# Altium PCB TinyPICO.PcbDoc
Units mil, origin at the board's own origin, x right, y up, seen from the top; angles counter-clockwise.
Board outline 1254 x 700 mil, 4 copper layers (Top, GND, 3.3V, Bottom), stack 67.876 mil thick; 37 components, 62 nets, 192 pads, 168 vias.
Unrouted connection lines stored in the file: 123.
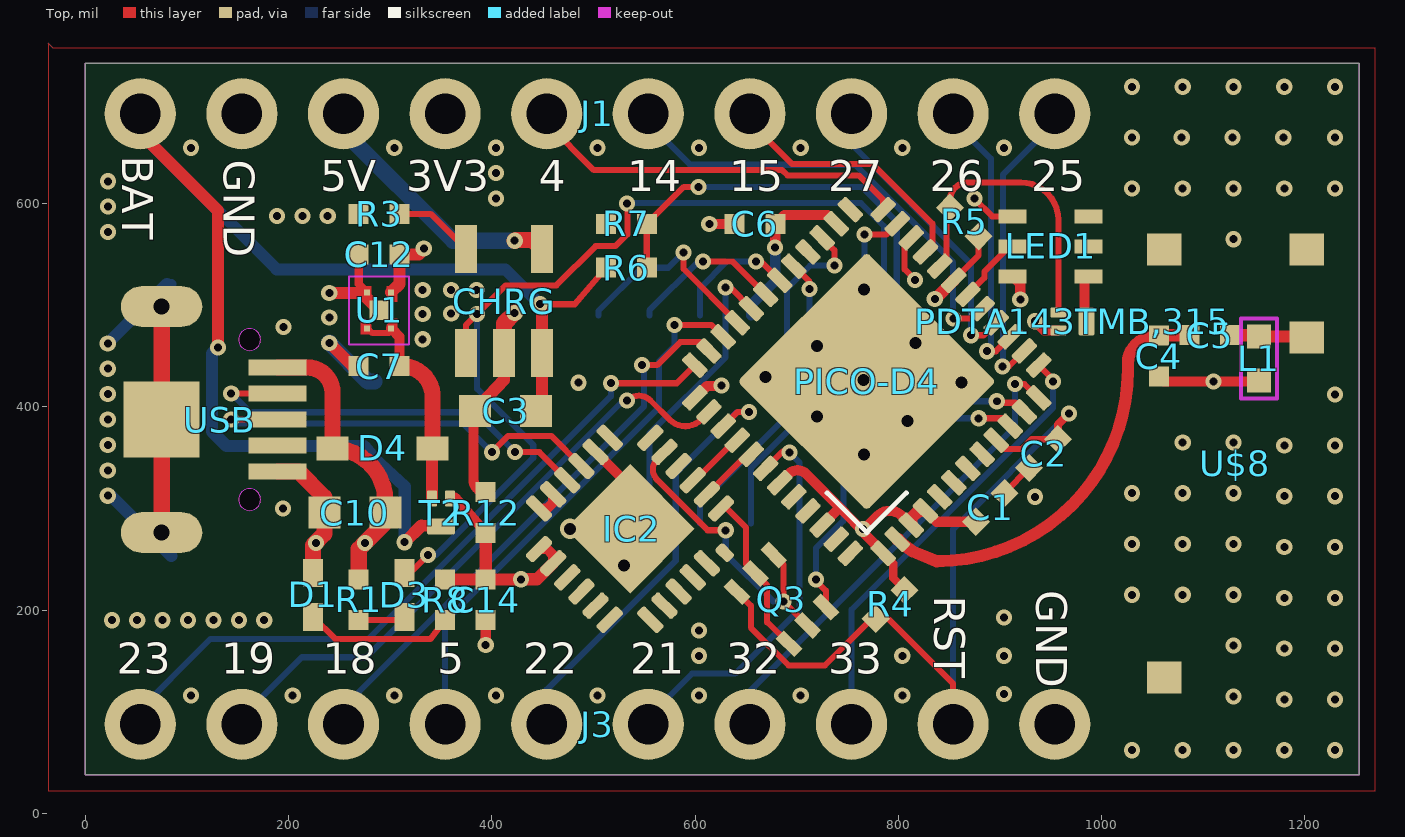
[diagram p0: Top view]
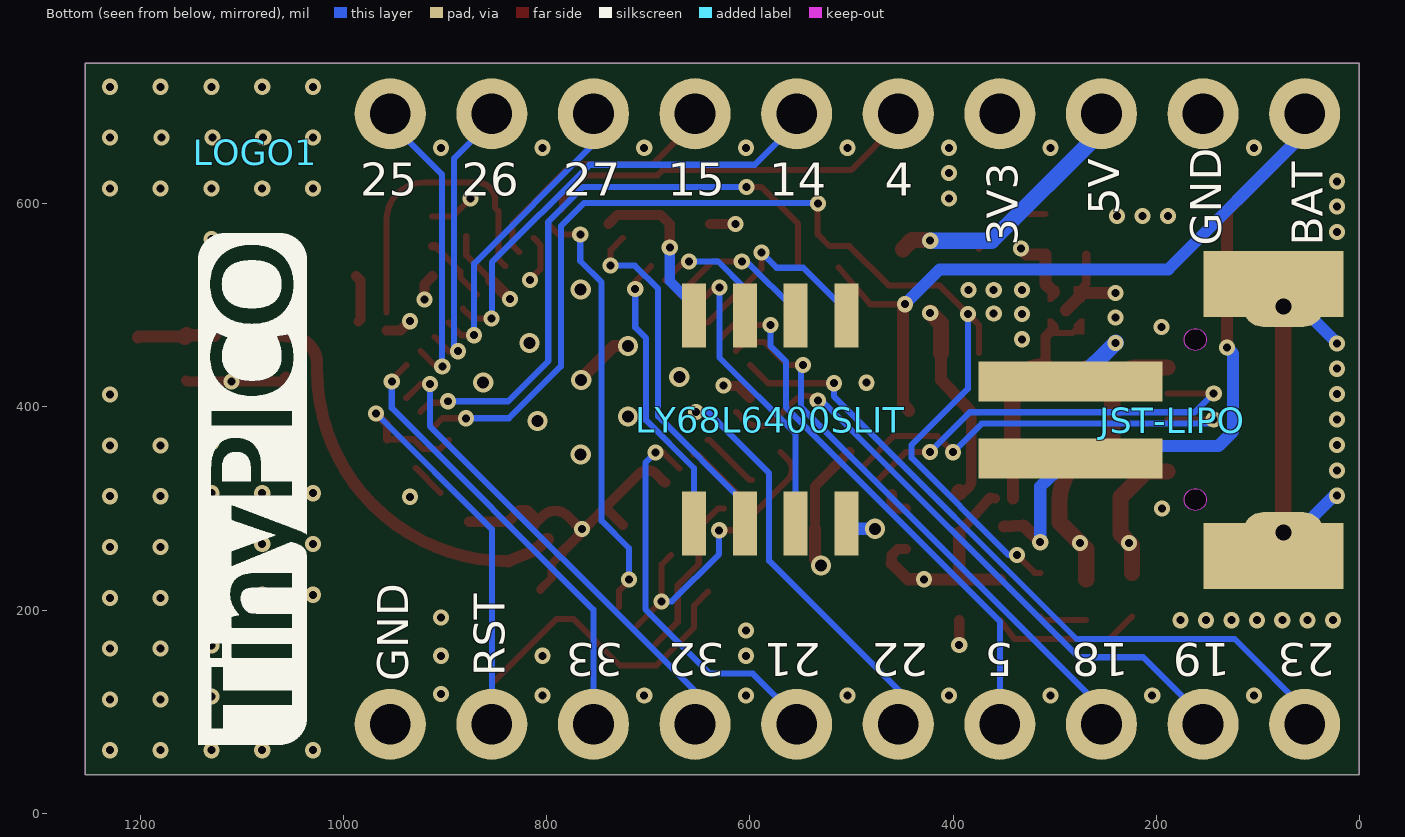
[diagram p1: Bottom view, seen from below]
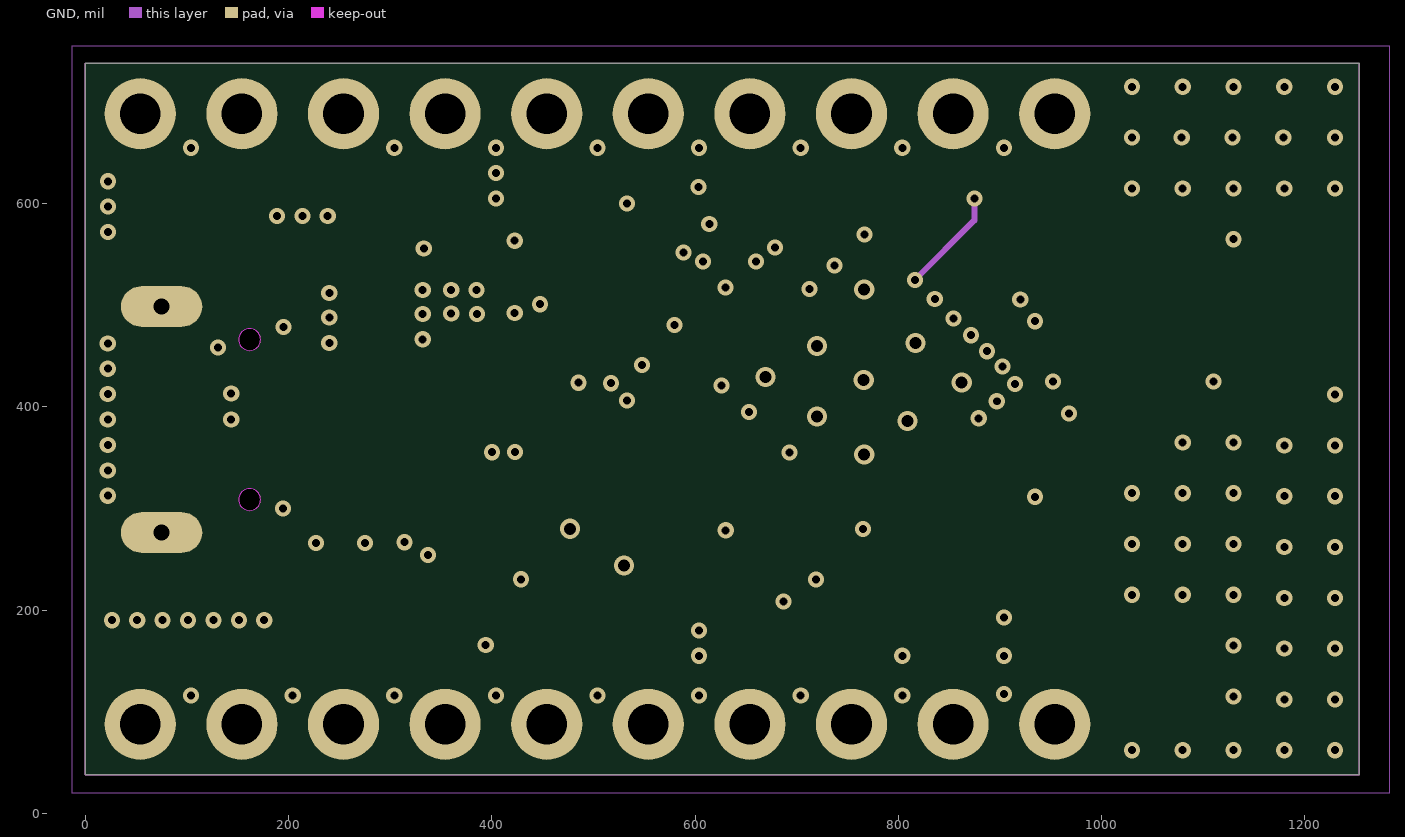
[diagram p2: GND]

## Layer stack, top to bottom
Top Solder: solder mask 0.4, Solder Resist, Dk 3.5
Top: signal copper 1.378
Dielectric 1: core 7.0866, FR-4, Dk 4.8
GND: signal copper 0.6693
Dielectric2: dielectric 12.6, FR-4, Dk 4.8
3.3V: signal copper 0.6693
Dielectric 3: prepreg 44.0945, FR-4, Dk 4.8
Bottom: signal copper 1.378
Bottom Solder: solder mask 0.4, Solder Resist, Dk 3.5

## Board outline
1254,738 1254,38 0,38 0,738
cut-out: 161.61,297.94 ccw(c161.61,308.76) 172.44,308.76 ccw(c161.61,308.76) 161.61,319.58 ccw(c161.61,308.76) 150.78,308.76 ccw(c161.61,308.76)
cut-out: 161.61,455.42 ccw(c161.61,466.24) 172.44,466.24 ccw(c161.61,466.24) 161.61,477.06 ccw(c161.61,466.24) 150.78,466.24 ccw(c161.61,466.24)

## Design rules (kind name [scope] priority, off if disabled: settings)
BoardOutlineClearance mdCopperDimension [All] p1: gap=10 ignorepadtopadclearanceinfootprint=FALSE except(0: Arc-SplitContinuation Track-SplitContinuation SMDPad-SplitContinuation THPad-SplitContinuation Via-SplitContinuation Fill-SplitContinuation Poly-SplitContinuation Region-SplitContinuation Text-SplitContinuation; 9: Poly-OutlineEdge Poly-CavityEdge Poly-CutoutEdge Poly-SplitBarrior)
Clearance Clearance_for_PolygonClass_Isolate_12 [InPolygonClass('Isolate_12') vs IsArc Or IsTrack Or IsPad Or IsVia Or IsFill Or IsRegion Or IsText] p1: gap=12 ignorepadtopadclearanceinfootprint=FALSE
Clearance "Clearance (Same Net)" [All] p2: gap=5 ignorepadtopadclearanceinfootprint=FALSE
Clearance [All] p3: gap=5 ignorepadtopadclearanceinfootprint=FALSE
HoleSize [All] p1: absolutevalues=TRUE maxlimit=100000 minlimit=7 maxpercent=80.000 minpercent=20.000
HoleToHoleClearance mdDrill [All] p1: gap=6 allowstackedmicrovias=TRUE
MinimumSolderMaskSliver [All] p1 off: minsoldermaskwidth=10
PasteMaskExpansion Expansion_SMDPaste_OFF [InPadClass('SMDPaste_OFF')] p1: expansion=0
PasteMaskExpansion mlMinCreamFrame [All] p2: expansion=0
PolygonConnect PolygonConnect_For_PolygonThermal_ON_Width100000_Gap100000 [InPolygonClass('PolygonThermal_ON_Width100000_Gap100000') vs Not IsVia] p1: connectstyle=Relief reliefconductorwidth=10 reliefentries=4 polygonreliefangle="90 Angle" airgapwidth=10
PolygonConnect PolygonConnect_For_PolygonThermal_ON_Width60000_Gap100000 [InPolygonClass('PolygonThermal_ON_Width60000_Gap100000') vs Not IsVia] p2: connectstyle=Relief reliefconductorwidth=6 reliefentries=4 polygonreliefangle="90 Angle" airgapwidth=10
PolygonConnect ThermalVias [IsVia] p3: connectstyle=Direct reliefconductorwidth=10 reliefentries=4 polygonreliefangle="90 Angle" airgapwidth=10
PolygonConnect [All] p4: connectstyle=Relief reliefconductorwidth=10 reliefentries=4 polygonreliefangle="90 Angle" airgapwidth=10
RoutingVias [All] p1: holewidth=7 width=15 viastyle="Through Hole" minholewidth=7 minwidth=15 maxholewidth=100 maxwidth=100
SolderMaskExpansion Expansion_SMDSolder_OFF [InPadClass('SMDSolder_OFF')] p1: expansion=0 istentingtop=FALSE
SolderMaskExpansion mlMinStopFrame [All] p2: expansion=1.25 istentingtop=FALSE
Width [All] p1: maxlimit=10 minlimit=5 preferedwidth=5
26 further rules are at their usual default settings.

## Classes and differential pairs
polygon class PolygonThermal_ON_Width100000_Gap100000: Polygon_1_Net_3.3V Polygon_1_Net_GND Polygon_1_Net_USB
polygon class PolygonThermal_ON_Width60000_Gap100000: Polygon_2_Net_GND
polygon class Isolate_12: Polygon_2_Net_GND
pad class SMDSolder_OFF: D1-P$1 D1-P$2 D3-P$1 D3-P$2 PDTA143TMB,315-1 PDTA143TMB,315-2 PDTA143TMB,315-3 PICO-D4-1 PICO-D4-2 PICO-D4-3 PICO-D4-4 PICO-D4-5 PICO-D4-6 PICO-D4-7 PICO-D4-8 PICO-D4-9 PICO-D4-10 PICO-D4-11 PICO-D4-12 PICO-D4-13 PICO-D4-14 PICO-D4-15 PICO-D4-16 PICO-D4-17 PICO-D4-18 PICO-D4-19 PICO-D4-20 PICO-D4-21 PICO-D4-22 PICO-D4-23 PICO-D4-24 PICO-D4-25 PICO-D4-26 PICO-D4-27 PICO-D4-28 PICO-D4-29 PICO-D4-30 PICO-D4-31 PICO-D4-32 PICO-D4-33 PICO-D4-34 PICO-D4-35 PICO-D4-36 PICO-D4-37 PICO-D4-38 PICO-D4-39 PICO-D4-40 PICO-D4-41 PICO-D4-42 PICO-D4-43 PICO-D4-44 PICO-D4-45 PICO-D4-46 PICO-D4-47 PICO-D4-48 PICO-D4-EXP T2-1 T2-2 T2-3 U1-1 U1-2 U1-3 U1-4
pad class SMDPaste_OFF: D1-P$1 D1-P$2 D3-P$1 D3-P$2 IC2-THERM PDTA143TMB,315-1 PDTA143TMB,315-2 PDTA143TMB,315-3 PICO-D4-1 PICO-D4-2 PICO-D4-3 PICO-D4-4 PICO-D4-5 PICO-D4-6 PICO-D4-7 PICO-D4-8 PICO-D4-9 PICO-D4-10 PICO-D4-11 PICO-D4-12 PICO-D4-13 PICO-D4-14 PICO-D4-15 PICO-D4-16 PICO-D4-17 PICO-D4-18 PICO-D4-19 PICO-D4-20 PICO-D4-21 PICO-D4-22 PICO-D4-23 PICO-D4-24 PICO-D4-25 PICO-D4-26 PICO-D4-27 PICO-D4-28 PICO-D4-29 PICO-D4-30 PICO-D4-31 PICO-D4-32 PICO-D4-33 PICO-D4-34 PICO-D4-35 PICO-D4-36 PICO-D4-37 PICO-D4-38 PICO-D4-39 PICO-D4-40 PICO-D4-41 PICO-D4-42 PICO-D4-43 PICO-D4-44 PICO-D4-45 PICO-D4-46 PICO-D4-47 PICO-D4-48 PICO-D4-EXP T2-1 T2-2 T2-3 U1-1 U1-2 U1-3 U1-4

## Components (designator, comment, footprint, x,y, rotation, side; value= is the part's Value field where it differs from the comment)
C1 "" _0402MP 890.5,301 r45 top
C2 "" _0402MP 943,354 r225 top
C3 "" _0603MP 413.5,396 r180 top
C4 "0.75pF" _0402MP 1056.5,450 r270 top
C5 "" _0402MP 1106.5,470.5 r0 top
C6 "0.1uF" _0402MP 659,580 r180 top
C7 "" _0402MP 289,440 r180 top
C10 "" _0603MP 265.2,296 r0 top
C12 "" _0402MP 289,550 r180 top
C14 "" _0402MP 394,210 r270 top
CHRG "TP4065-4.2V-SOT25-R" SOT23-5 412,504 r0 top
D1 "RED" 0402.LED 224,215 r90 top
D3 "ORANGE" 0402.LED 314,215 r90 top
D4 "" SOD323_ST 292.5,359 r180 top
IC2 "" MICROBUILDER_QFN24_4MM_SMSC 536,280 r315 top
J1 "" 1X10_NO_SILK 54,688.5 r0 top
J3 "" 1X10_NO_SILK 54,87.5 r0 top
JST-LIPO "LIPO" JSTPH2 142.5,387 r270 bottom
L1 "7.5nH" RESC0402_N 1155,447.5 r90 top
LED1 "" MICROBUILDER_APA102_2020 950,558 r180 top
LOGO1 "" OSHW-LOGO-S 1086.72,650.74 r90 bottom
LY68L6400SLIT "PSRAM0" SOP8 580,387.5 r180 bottom
PDTA143TMB,315 "TINYPICO-PNPAMB" SOT883(B) 971.5,484 r0 top
PICO-D4 "" PICO-D4-QFN48 769,425 r135 top
Q3 "" DUAL_NPN_SC70-6 685,210.5 r225 top
R1 "" _0402MP 269,210 r270 top
R3 "" _0402MP 289,590 r180 top
R4 "" _0402MP 792,205.5 r45 top
R5 "100K" _0402MP 865,582 r315 top
R6 "" _0402MP 532.5,537 r0 top
R7 "" _0402MP 532.5,580 r180 top
R8 "" _0402MP 354,210 r270 top
R12 "" _0402MP 394,296 r90 top
T2 "" SOT883(B) 350,296 r270 top
U1 "" VREG_NCP170AMX300TCG 289,495 r270 top
U$8 "" PRO-OB-440 1029,118 r90 top
USB "C40942" USB-B-MICRO-SMD 75,387.5 r0 top

## Footprints (in the part's own frame and the unit in brackets; to place one, negate y for a bottom-side part, rotate by r counter-clockwise, add the part's x,y. Pads: shape width x height; smd on the part's side, far side on the other; paste and mask are expansions set on the pad)
1X10_NO_SILK [mil] "1X10_NO_SILK"
  round 70 hole 40: 1(0,0) 2(100,0) 3(200,0) 4(300,0) 5(400,0) 6(500,0) 7(600,0) 8(700,0) 9(800,0) 10(900,0)
0402.LED [mil] "0402.LED"
  rect 27.56x19.69 smd paste+0 mask+0: P$1(-21.65,0) P$2(21.65,0)
_0402MP [mil] "_0402MP"
  rect 19.69x19.69 smd: 1(-20,0) 2(20,0)
_0603MP [mil] "_0603MP"
  rect 31.5x31.5 smd: 1(-30,0) 2(30,0)
DUAL_NPN_SC70-6 [mm] "DUAL_NPN_SC70-6"
  rect 0.3x0.66 smd: 1(-0.65,-0.92) 2(0,-0.92) 3(0.65,-0.92) 4(0.65,0.92) 5(0,0.92) 6(-0.65,0.92)
JSTPH2 [mil] "JSTPH2"
  rect 39.37x181.1 smd: 1(-38,-142) 2(38,-142)
  rect 65x138 smd: SHLD1(-133.86,58) SHLD2(133.86,58)
MICROBUILDER_APA102_2020 [mm] "MICROBUILDER_APA102_2020"
  rect 0.7x0.35 smd: 1(-0.95,-0.75) 2(-0.95,0) 3(-0.95,0.75) 4(0.95,0.75) 5(0.95,0) 6(0.95,-0.75)
MICROBUILDER_QFN24_4MM_SMSC [mil] "MICROBUILDER_QFN24_4MM_SMSC"
  rrect50% 29x11.02 smd: 1(-77.5,49.21) 2(-77.5,29.53) 3(-77.5,9.84) 4(-77.5,-9.84) 5(-77.5,-29.53) 6(-77.5,-49.21) 13(77.5,-49.21) 14(77.5,-29.53) 15(77.5,-9.84) 16(77.5,9.84) 17(77.5,29.53)
  rrect50% 11.02x29 smd: 7(-49.21,-77.5) 8(-29.53,-77.5) 9(-9.84,-77.5) 10(9.84,-77.5) 11(29.53,-77.5) 12(49.21,-77.5) 19(49.21,77.5) 20(29.53,77.5) 21(9.84,77.5) 22(-9.84,77.5) 23(-29.53,77.5) 24(-49.21,77.5)
  rrect50% 18x11.02 smd: 18(82.5,49.21)
  rect 90x90 smd paste+0: THERM(0,0)
OSHW-LOGO-S [mil] "OSHW-LOGO-S"
PICO-D4-QFN48 [mil] "PICO-D4-QFN48"
  rrect30% 26x11.81 smd paste+0 mask+0: 1(-131,108.27) 2(-131,88.58) 3(-131,68.9) 4(-131,49.21) 5(-131,29.53) 6(-131,9.84) 7(-131,-9.84) 8(-131,-29.53) 9(-131,-49.21) 10(-131,-68.9) 11(-131,-88.58) 12(-131,-108.27) 25(131,-108.27) 26(131,-88.58) 27(131,-68.9) 28(131,-49.21) 29(131,-29.53) 30(131,-9.84) 31(131,9.84) 32(131,29.53) 33(131,49.21) 34(131,68.9) 35(131,88.58) 36(131,108.27)
  rrect30% 11.81x26 smd paste+0 mask+0: 13(-108.27,-131) 14(-88.58,-131) 15(-68.9,-131) 16(-49.21,-131) 17(-29.53,-131) 18(-9.84,-131) 19(9.84,-131) 20(29.53,-131) 21(49.21,-131) 22(68.9,-131) 23(88.58,-131) 24(108.27,-131) 37(108.27,131) 38(88.58,131) 39(68.9,131) 40(49.21,131) 41(29.53,131) 42(9.84,131) 43(-9.84,131) 44(-29.53,131) 45(-49.21,131) 46(-68.9,131) 47(-88.58,131) 48(-108.27,131)
  rrect5% 180x180 smd paste+0 mask+0: EXP(0,0)
  silkscreen extent -105,50 -50,105
PRO-OB-440 [mil] "PRO-OB-440"
  rect 31.5x33.86 smd: FEED(350.39,-173.23) GND(437.01,-173.23) P$3(437.01,-32.68) P$4(15.75,-32.68)
RESC0402_N [mil] "RESC0402_N"
  rect 23.62x23.62 smd: 1(-21.65,0) 2(21.65,0)
  Top keep-out lines w3.94: -39.37,17.72 -39.37,-17.72 39.37,-17.72 39.37,17.72 -39.37,17.72
SOD323_ST [mil] "SOD323_ST"
  rect 31.5x23.62 smd: A(49.21,0) C(-49.21,0)
SOP8 [mil] "SOP8"
  rect 23.62x62.99 smd: 1(-75,-102.36) 2(-25,-102.36) 3(25,-102.36) 4(75,-102.36) 5(75,102.36) 6(25,102.36) 7(-25,102.36) 8(-75,102.36)
SOT23-5 [mil] "SOT23-5"
  rect 21.65x47.24 smd: 1(-37.4,-51.19) 2(0,-51.19) 3(37.4,-51.19) 4(37.4,51.19) 5(-37.4,51.19)
SOT883(B) [mm] "SOT883(B)"
  rrect25% 0.4x0.25 smd paste+0 mask+0: 1(-0.35,0.225) 2(-0.35,-0.225)
  rrect25% 0.4x0.7 smd paste+0 mask+0: 3(0.35,0)
USB-B-MICRO-SMD [mil] "USB-B-MICRO-SMD"
  rect 57.09x15.75 smd: D+(114.17,0) D-(114.17,25.59) GND(114.17,-51.18) ID(114.17,-25.59) VBUS(114.17,51.18)
  oval 80x40 hole 15.75: P$1(0,111.22) P$2(0,-111.22)
  rect 74.8x74.8 smd: SHIELD3(0,0)
VREG_NCP170AMX300TCG [mil] "VREG_NCP170AMX300TCG"
  rect 6x6 smd paste+0 mask+0: 1(-17.72,11.81) 2(-17.72,-11.81) 3(17.72,-11.81) 4(17.72,11.81)
  rect 19x19 smd: 5(0,0)
  Top region: 8.27,17.91 8.27,13.58 14.17,7.68 23.62,7.68 23.62,17.91 8.27,17.91
  Top region: -14.17,7.68 -23.62,7.68 -23.62,17.91 -8.27,17.91 -8.27,13.58 -14.17,7.68
  Top region: 8.27,-17.91 8.27,-13.58 14.17,-7.68 23.62,-7.68 23.62,-17.91 8.27,-17.91
  Top region: -8.27,-17.91 -8.27,-13.58 -14.17,-7.68 -23.62,-7.68 -23.62,-17.91 -8.27,-17.91
  Top keep-out lines w1.97: 33.46,-29.53 -33.46,-29.53 -33.46,29.53 33.46,29.53 33.46,-29.53

## Part data
C1 C2 C4 C5 C6 C7 C12 C14 R1 R3 R4 R5 R6 R7 R8 R12: library part _0402MP, PackageName=_0402MP
C3 C10: library part _0603MP, PackageName=_0603MP
CHRG: library part SOT23-5, PackageName=SOT23-5
D1 D3: library part 0402.LED, PackageName=0402.LED
D4: library part SOD323_ST, PackageName=SOD323_ST
IC2: library part MICROBUILDER_QFN24_4MM_SMSC, PackageName=MICROBUILDER_QFN24_4MM_SMSC
J1 J3: library part 1X10_NO_SILK, PackageName=1X10_NO_SILK
JST-LIPO: library part JSTPH2, PackageName=JSTPH2
L1: library part RESC0402_N, PackageName=RESC0402_N
LED1: library part MICROBUILDER_APA102_2020, PackageName=MICROBUILDER_APA102_2020
LOGO1: library part OSHW-LOGO-S, PackageName=OSHW-LOGO-S
LY68L6400SLIT: library part SOP8, PackageName=SOP8
PDTA143TMB,315 T2: library part SOT883(B), PackageName=SOT883(B)
PICO-D4: library part PICO-D4-QFN48, PackageName=PICO-D4-QFN48
Q3: library part DUAL_NPN_SC70-6, PackageName=DUAL_NPN_SC70-6
U1: library part VREG_NCP170AMX300TCG, PackageName=VREG_NCP170AMX300TCG
U$8: library part PRO-OB-440, PackageName=PRO-OB-440
USB: library part USB-B-MICRO-SMD, PackageName=USB-B-MICRO-SMD

## Free pads (board coordinates)
  round 21.65 hole 21.65 unplated: MH1(161.61,466.24) MH2(161.61,308.76)

## Via types
v1: diameter 15.87/15.87/15.87/15.87 (per signal layer), hole 7.87, Top to Bottom, 157 vias
v2: diameter 19.81/19.81/19.81/19.81 (per signal layer), hole 11.81, Top to Bottom, 11 vias

## Nets (pads, with @x,y where several pads share a name; then routed paths per layer and width w, separated by ;. In a path a pad name is that pad's centre, name@x,y a point inside that pad or via, vN(x,y) a via of type N, cw(c..) or ccw(c..) an arc to the next point about the centre after c; other vN are vias at no path point)
3.3V: C1.1 C12.1 J1.4 PDTA143TMB,315.2 PICO-D4.1 PICO-D4.3 PICO-D4.4 PICO-D4.19 PICO-D4.37 PICO-D4.43 PICO-D4.46 R4.2 R5.2 U1.1 | length 563.3
  Top w6: PICO-D4.19 879.14,549.06 R5.2
  Top w8: PICO-D4.1 795.07,245.81 795.07,231.71 806.14,220.64 R4.2
  Top w10: PICO-D4.37 600.16,408.93 611.87,420.64 625.64,420.64 v1(626,421) ; PICO-D4.43 683.67,325.41 692.39,334.12 cw(c700.76,325.75) 709.14,334.12 741.38,301.88 741.38,301.8 748.55,294.63 ; PICO-D4.46 725.15,283.65 742.38,300.88 748.55,294.63 ; PICO-D4.1 785.07,256.81 776.56,265.33 776.56,265.4 765.35,276.61 cw(c766.85,278.11) v1(765.35,279.61) ; PICO-D4.3 804.2,292.37 ccw(c791.65,279.82) 779.1,292.37 766.34,279.61 v1(765.35,279.61) ; PICO-D4.4 827.18,297.57 837.89,286.86 C1.1 ; v1(836,506) v1@836.08,506 ; v1(934.5,484.28) 943.5,475.28 952.58,475.28 952.72,475.14 957.72,475.14 ; 748.55,294.63 763.37,279.61 v1(765.35,279.61)
  Top w12: U1.1 309,520.91 C12.1 328,550 333,555 v1(333,556) ; PICO-D4.3 812.91,290.65 819.83,297.57 PICO-D4.4 ; v1@836.08,506 PICO-D4.19
3V: IC2.5 IC2.6 | length 24.4
  Top w10: IC2.6 454.4,300 460.32,305.92 IC2.5
ANT: C5.2 L1.2 U$8.FEED | length 80.1
  Top w12: C5.2@1127,470 C5.2 1154.5,470.5 1154.5,469.65 L1.2 1201.47,469.15 U$8.FEED
  Top w16: L1.2@1154.5,470.5 L1.2@1156.14,468.86
CLK: LY68L6400SLIT.6 PICO-D4.31 | length 152.8
  Top w6: v1(608,543) 636.91,543 669.24,510.67 PICO-D4.31
  Bottom w6: LY68L6400SLIT.6 555,495 603,543 v1(608,543)
D+: IC2.3 USB.D+ | length 422.5
  Top w6: v1(143.5,387.5) USB.D+ ; v1(400,355.32) 416,371.32 458.6,371.32 IC2.3
  Bottom w6: v1(143.5,387.5) 147.5,383.5 371.82,383.5 v1(400,355.32)
D-: IC2.4 USB.D- | length 411.7
  Top w6: v1(143.5,413.06) USB.D- ; v1(422.84,355.38) 446.7,355.38 IC2.4
  Bottom w6: v1(143.5,413.06) 143.93,413.06 162.3,394.69 383.53,394.69 v1(422.84,355.38)
DATA_OUT: 
DTR: IC2.23 Q3.1 Q3.5 | length 303.2
  Top w6: IC2.23 562.83,348.58 ccw(c573.05,338.36) 562.83,328.13 612.43,278.52 v1(630.21,278.52) ; Q3.1 687,244.69 v1(687,208.5) Q3.5
  Bottom w6: v1(630.21,278.52) 630.21,255.1 676.82,208.5 v1(687,208.5)
GND: C1.2 C2.2 C3.2 C4.2 C6.2 C7.2 C10.1 C12.2 C14.2 CHRG.2 D1.P$2 IC2.2 IC2.THERM J1.2 J3.10 JST-LIPO.1 JST-LIPO.SHLD1 JST-LIPO.SHLD2 L1.1 LED1.4 LY68L6400SLIT.4 PICO-D4.EXP R3.2 R7.2 R12.2 U1.2 U1.5 U$8.GND USB.GND USB.P$1 USB.P$2 USB.SHIELD3 | length 1365.6
  Top w6: C1.2 904.64,315.64 C2.2
  Top w8: C12.2 269,520.91 U1.2 277.19,506.81
  Top w10: C3.2 382.06,394.39 382.06,327.89 ccw(c393.95,327.89) R12.2 ; v1(394,165.5) C14.2 ; IC2.2 536,321.76 IC2.THERM ; v1(614,580) C6.2 ; LED1.4 920.14,520.93 v1(920.14,505.5) ; C4.2 1061.5,425 v1(1110.25,425) 1154.15,425 L1.1
  Top w12: v1(240,463) 263,440 C7.2 ; v1(240,512) 272,512 277.19,506.81 U1.5 ; C3.2 412,426.43 CHRG.2 ; v2(530,244) 536,250 IC2.THERM ; v2(720,460) 734,460 PICO-D4.EXP
  Top w16: USB.P$2 USB.SHIELD3 USB.P$1 ; USB.GND 209.88,336.32 235.2,311 C10.1 235.2,274.97 225,264.77 224,263.53 D1.P$2 ; R12.2 R12.2 ; CHRG.2 412,482 v1(422.5,492.5)
  Bottom w10: v1(22,312.5) v1@25.14,312.5 ; JST-LIPO.SHLD1@80.36,520.86 JST-LIPO.SHLD1
  Bottom w12: v1(22,462.5) JST-LIPO.SHLD1@80.36,520.86 ; v1@25.14,312.5 JST-LIPO.SHLD2 ; v2(477,280) 499.86,280 LY68L6400SLIT.4
  Bottom w16: v1(240,463) 278,425 JST-LIPO.1
  other v1: 1030,62 1080,62 1130,62 1180,62 1230,62 1180,112 1230,112 1130,115 104,116 204,116 304,116 404,116 504,116 604,116 704,116 804,116 904,117.5 604,155 804,155 904,155 1180,162 1230,162 1130,165 604,180 26,190 51,190 76,190 101,190 126,190 151,190 176,190 904,192.5 1180,212 1230,212 1030,215 1080,215 1130,215 1180,262 1230,262 1030,265 1080,265 1130,265 227,266 194.5,300 934.5,311.5 1180,312 1230,312 1030,315 1080,315 1130,315 22,337.5 22,362.5 1180,362 1230,362 1080,365 1130,365 22,387.5 22,412.5 1230,412 485.25,423.75 22,437.5 332,466.5 195,478.5 240,488 332,491.5 360,492 332,515 360,515 385,515 1130,565 22.25,572 188.5,588 213.5,588 238.5,588 22.25,597 404,605 1030,615 1080,615 1130,615 1180,615 1230,615 22.25,622 404,630 104,655 304,655 404,655 504,655 604,655 704,655 804,655 904,655 1030,665 1079,665 1129,665 1179,665 1230,665 1030,715 1080,715 1130,715 1180,715 1230,715
  other v2: 766.5,353 809,386 720,390.5 862.5,424 766,426.5 669.5,429.5 817,463 766.5,515.5
GND1: 
GND2: 
GND4: 
GND6: 
GND8: 
GPIO0: PICO-D4.23 Q3.6 | length 427.5
  Top w6: v1(719,230) 718.35,229.35 728.71,218.98 Q3.6 ; v1(766.96,569.54) 788.27,569.54 PICO-D4.23
  Bottom w6: v1(719,230) 719,260.77 745.96,287.73 745.96,522.54 766.96,543.54 v1(766.96,569.54)
GPIO2: LED1.6 PICO-D4.22 | length 197.5
  Top w6: PICO-D4.22 808.91,562.35 808.91,562.18 806.2,559.46 806.2,535.3 v1(816.5,525) ; v1(875,605) 892.47,587.53 LED1.6
  GND w6: v1(816.5,525) 875,583.5 v1(875,605)
GPIO4: J1.5 PICO-D4.24 | length 381
  Top w6: J1.5 454,679.5 500.44,633.06 685.76,633.06 691,627.82 760.96,627.82 785.07,603.7 PICO-D4.24
GPIO5: J3.4 PICO-D4.34 | length 539.4
  Top w6: v1(579.75,480.5) 579.88,480.63 615.94,480.63 PICO-D4.34
  Bottom w6: J3.4 354,188.85 564.58,399.43 564.58,444.82 579.81,460.05 v1(579.75,480.5) v1(579.75,480.5)
GPIO7: LY68L6400SLIT.3 PICO-D4.32 | length 297.5
  Top w6: v1(630,517.5) 634.74,517.5 PICO-D4.32
  Bottom w6: LY68L6400SLIT.3 555,373.54 630.02,448.56 v1(630,517.5)
GPIO8: LY68L6400SLIT.5 PICO-D4.33 | length 203.2
  Top w6: v1(588.75,552) 588.75,535.66 PICO-D4.33
  Bottom w6: LY68L6400SLIT.5 505,494.48 547.44,536.92 573.67,536.92 v1(588.75,552)
GPIO9: PICO-D4.28
GPIO10: LY68L6400SLIT.1 PICO-D4.29 | length 283.8
  Top w6: PICO-D4.29 712.85,522.91 v1(712.85,516.15)
  Bottom w6: LY68L6400SLIT.1 655,339.68 702.09,386.77 702.09,467.42 712.85,478.17 v1(712.85,516.15)
GPIO11: LY68L6400SLIT.7 PICO-D4.30 | length 123.8
  Top w6: v1(660.09,543.09) 664.83,543.09 PICO-D4.30
  Bottom w6: LY68L6400SLIT.7 605,516.71 631.38,543.09 v1(660.09,543.09)
GPIO12: LED1.5 PICO-D4.18 | length 67.2
  Top w6: PICO-D4.18 884.82,526.9 884.82,533.09 LED1.5@909.73,558
  Top w8: LED1.5@909.73,558 LED1.5
GPIO13: PDTA143TMB,315.1 PICO-D4.20 R5.1 | length 298
  Top w6: PICO-D4.20 847.47,545.22 847.47,592.75 R5.1 850.86,603.14 cw(c868.65,603.14) 868.65,620.94 920.56,620.94 cw(c920.56,583.78) 957.72,583.78 957.72,492.86
GPIO14: J1.6 PICO-D4.17 | length 453.2
  Top w6: v1(854.5,487) 866.5,487 872.76,487 PICO-D4.17
  Bottom w6: J1.6 554,679.5 595.21,638.29 757.75,638.29 853.94,542.1 853.94,487.56 v1(854.5,487)
GPIO15: J1.7 PICO-D4.21 | length 260.1
  Top w6: J1.7 654,680.5 695.68,638.82 775.14,638.82 833.55,580.41 833.55,558.59 827.39,552.43 PICO-D4.21
GPIO16: PICO-D4.25
GPIO17: LY68L6400SLIT.2 PICO-D4.27 | length 355
  Top w6: PICO-D4.27 737.14,554.29 v1(737.14,538.99)
  Bottom w6: LY68L6400SLIT.2 605,305.23 690.41,390.64 690.41,516.25 713.14,538.99 v1(737.14,538.99)
GPIO18: J3.3 PICO-D4.35 | length 555.8
  Top w6: v1(547.75,441) 562.75,441 585.46,463.71 605.02,463.71 PICO-D4.35
  Bottom w6: J3.3 254,104.41 549.75,400.15 549.75,439 v1(547.75,441)
GPIO19: J3.2 PICO-D4.38 | length 612.8
  Top w6: v1(533.18,406.22) cw(c544.68,394.72) 556.18,406.22 575.1,387.29 ccw(c590.47,402.66) 605.84,387.29 613.56,395.01 PICO-D4.38
  Bottom w6: J3.2 154,94.5 213,153.5 276.54,153.5 529.26,406.22 v1(533.18,406.22)
GPIO21: J3.6 PICO-D4.42 | length 389.2
  Top w6: PICO-D4.42 685.08,355 cw(c689.04,351.04) v1(693,355)
  Bottom w6: J3.6 554,94.5 597,137.5 639.5,137.5 702.94,200.94 702.94,345.06 v1(693,355)
GPIO22: J3.5 PICO-D4.39 | length 427.6
  Top w6: PICO-D4.39 628.09,381.09 641.96,394.96 v1(652.96,394.96)
  Bottom w6: J3.5 454,121.5 581,248.5 581,334.41 641.55,394.96 v1(652.96,394.96)
GPIO23: J3.1 PICO-D4.36 | length 714.9
  Top w6: v1(517.27,423.23) 581.97,423.23 PICO-D4.36
  Bottom w6: J3.1 46.5,95 123,171.5 278.54,171.5 517.27,410.23 v1(517.27,423.23)
GPIO25: J1.10 PICO-D4.14 | length 297.8
  Top w6: v1(902.78,439.72) 908.99,439.72 PICO-D4.14
  Bottom w6: v1(902.78,439.72) 903.21,440.15 903.21,628.71 954,679.5 J1.10
GPIO26: J1.9 PICO-D4.15 | length 279.8
  Top w6: v1(887.27,454.73) 896.17,454.73 PICO-D4.15
  Bottom w6: J1.9 854,681.5 891.27,644.23 891.27,458.73 v1(887.27,454.73)
GPIO27: J1.8 PICO-D4.16 | length 296.7
  Top w6: v1(871.51,470.49) 884.09,470.49 PICO-D4.16
  Bottom w6: J1.8 754,658.5 871.51,540.99 v1(871.51,470.49)
GPIO32: J3.7 PICO-D4.12 | length 471.9
  Top w6: v1(915,422.5) 924,422.5 937.57,408.93 PICO-D4.12
  Bottom w6: J3.7 654,120.04 915,381.04 v1(915,422.5)
GPIO33: J3.8 PICO-D4.13 | length 441.7
  Top w6: PICO-D4.13 938.19,440.81 952.5,426.5 v1(952.5,425)
  Bottom w6: J3.8 754,200.5 952.5,399 v1(952.5,425)
GPIO35: PICO-D4.11 R6.2 R7.1 | length 601.9
  Top w6: R6.2 R7.1 589,616.5 v1(603.5,616.5) ; v1(897,405.5) 898.49,404.01 915.27,404.01 PICO-D4.11
  Bottom w6: v1(603.5,616.5) 763.98,616.5 798.5,581.98 798.5,445 838,405.5 v1(897,405.5)
LNA_IN: C4.1 C5.1 PICO-D4.2 | length 423.3
  Top w12: PICO-D4.2 799.96,269.73 805.04,264.65 814.37,257.67 837.84,248.07 ccw(c837.84,436.23) 1026,436.23 1026,442.65 cw(c1052.5,442.65) 1052.5,469.15 1055.65,469.15 C4.1 1057,470.5 C5.1
N$1: D1.P$1 R8.2 | length 148
  Top w6: D1.P$1 245.78,171.57 339.57,171.57 R8.2
N$2: D3.P$1 R1.2 | length 46.4
  Top w6: R1.2 310.65,190 D3.P$1
N$4: IC2.1
N$5: IC2.24
N$6: IC2.22
N$7: IC2.18
N$8: LED1.3 PDTA143TMB,315.3 | length 46.9
  Top w10: 985.28,484 983.4,485.88 983.4,524.47 LED1.3
PROG: CHRG.5 R3.1 | length 80
  Top w6: R3.1 339.78,590 CHRG.5
RESET: C2.1 J3.9 PICO-D4.9 Q3.3 R4.1 | length 792.4
  Top w6: Q3.3 655,204.31 655,182.64 692.21,145.43 727.84,145.43 773.77,191.36 R4.1 790.18,191.36 854,127.54 J3.9 ; PICO-D4.9 896.6,367.17 905.32,358.45 921.45,358.45 931.14,368.14 C2.1
  Top w8: C2.1 957.14,382.64 v1(968,393.5)
  Bottom w6: J3.9 854,279.5 v1(968,393.5)
RTS: IC2.19 Q3.2 Q3.4 | length 164.4
  Top w6: IC2.19 631.27,300 650.3,280.97 650.3,245.2 Q3.2 671,224.5 671,188 671.31,188 Q3.4
RXD: IC2.21 PICO-D4.40 | length 59.8
  Top w6: IC2.21 601.12,328.72 639.57,367.17 PICO-D4.40
SENS_CAPN: PICO-D4.7
SENS_CAPP: PICO-D4.6
SENS_VN: PICO-D4.8
SENS_VP: PICO-D4.5
STAT: CHRG.1 D3.P$2 PICO-D4.10 | length 1141.4
  Top w6: D3.P$2 319.65,236.65 v1(337,254) ; CHRG.1 374.6,480.6 v1(385.5,491.5) 413.56,519.56 463.54,519.56 502.14,558.16 521.66,558.16 533.34,569.84 533.34,599.66 v1(533,600) ; v1(879.24,388.74) 902.7,388.74 PICO-D4.10
  Bottom w6: v1(337,254) 345,254 440.78,349.78 440.78,362.5 385.5,417.78 v1(385.5,491.5) ; v1(533,600) 533.56,600.56 763.36,600.56 786,577.93 786,439.94 837.2,388.74 v1(879.24,388.74)
TXD: IC2.20 PICO-D4.41 | length 60
  Top w6: IC2.20 613.04,314.8 651.49,353.25 PICO-D4.41
USB: C10.2 C14.1 CHRG.4 D4.A IC2.7 IC2.8 J1.3 R1.1 R8.1 R12.1 T2.1 USB.VBUS | length 788.2
  Top w10: T2.1 363.72,310.78 R12.1 ; IC2.7 454.4,260 460.32,254.08 IC2.8
  Top w12: R8.1 C14.1 ; R12.1 C14.1 ; IC2.8 444.53,230.28 v1(428.72,230.28) 428.43,230 C14.1
  Top w16: USB.VBUS 218.38,438.68 cw(c218.38,413.77) 243.29,413.78 D4.A cw(c243.29,307.09) 295.2,307.09 C10.2 295.2,286.2 v1(275,266) 269,260 R1.1 ; v1(422.5,563.5) 423.19,564.18 440.4,564.18 CHRG.4
  Bottom w16: J1.3 254,671.39 361.89,563.5 v1(422.5,563.5)
VBAT: C3.1 CHRG.3 J1.1 JST-LIPO.2 R6.1 T2.3 | length 1328.2
  Top w6: v1(447.5,501) 481.64,501 R6.1
  Top w12: J1.1 54,669.5 130.5,593 v1(130.5,458.5) ; v1(314.22,266.74) 330.7,283.22 T2.3 ; C3.1 449.4,403.61 CHRG.3 449.4,499.1 v1(447.5,501)
  Bottom w12: J1.1 54,669.62 188.31,535.31 413.19,535.31 v1(447.5,501) ; v1(130.5,458.5) 124.56,452.56 124.56,375.66 138.72,361.5 274.3,361.5 JST-LIPO.2 314.22,321.58 v1(314.22,266.74)
VBUS: C7.1 D4.C T2.2 U1.3 U1.4 | length 219.9
  Top w6: U1.3 277.34,477.7 282.52,472.52 298.5,472.52 301.87,475.9 U1.4@301.87,476.22
  Top w10: U1.4 301.87,476.22 309,469.09 C7.1
  Top w12: T2.2 341.14,358.43 D4.C
  Top w16: C7.1 cw(c311.5,409.79) 341.71,412.29 D4.C
VDDSDIO: C6.1 LY68L6400SLIT.8 PICO-D4.26 | length 167.4
  Top w10: v1(678.88,556.83) 678.88,579.88 C6.1 687.98,588.98 730.29,588.98 PICO-D4.26
  Bottom w10: LY68L6400SLIT.8 655,500 678.88,523.88 v1(678.88,556.83)
pads on no net: IC2.9 IC2.10 IC2.11 IC2.12 IC2.13 IC2.14 IC2.15 IC2.16 IC2.17 LED1.1 LED1.2 PICO-D4.44 PICO-D4.45 PICO-D4.47 PICO-D4.48 U$8.P$3 U$8.P$4 USB.ID

## Polygon pours and split planes (outlines as drawn)
GND on GND "Polygon_1_Net_GND" (solid, remove dead copper, pour order 2): -13.5,755 -13.5,20 1284,20 1284,755
GND on Top "Polygon_2_Net_GND" (solid, remove dead copper, pour order 3): -36.5,757.74 -36.5,22 1269.5,22 1269.5,753 -31.76,753
USB on 3.3V "Polygon_1_Net_USB" (solid, remove dead copper, pour order 0): -26,755 -26,20 450,20 450,237.57 261.5,426.07 261.5,755
3.3V on 3.3V "Polygon_1_Net_3.3V" (solid, remove dead copper, pour order 1): 297,755 297,435.43 474,258.43 474,20 973.5,20 973.5,755

## Keep-outs
Keep-Out Layer:
  the board outline again, w0

## Other copper
Top:
  pour cut-out: 1176.5,494.37 1176.5,443.5 1228.5,443.5 1228.5,494.37 1176.5,494.37
  pour cut-out: 1030.5,164.5 1030.5,102 1093,102 1093,164.5 1030.5,164.5
  pour cut-out: 1030.5,586.5 1030.5,524 1093,524 1093,586.5 1030.5,586.5
GND:
  pour cut-out: 1030.5,164.5 1030.5,102 1093,102 1093,164.5 1030.5,164.5
  pour cut-out: 1030.5,586.5 1030.5,524 1093,524 1093,586.5 1030.5,586.5
  pour cut-out: 1176.5,494.37 1176.5,443.5 1228.5,443.5 1228.5,494.37 1176.5,494.37

## Silkscreen, mask and mechanical layers (free items; w line width, h text height)
Top Overlay:
  text "BAT" at 36.26,647.23 h30.6 r270
  text "GND" at 136.26,643.23 h30.6 r270
  text "5V" at 230.96,612.15 h30.6
  text "3V3" at 315.66,612.15 h30.6
  text "4" at 446.25,612.15 h30.6
  text "14" at 533.51,612.15 h30.6
  text "15" at 633.51,612.15 h30.6
  text "27" at 730.96,612.15 h30.6
  text "26" at 830.96,612.15 h30.6
  text "25" at 930.96,612.15 h30.6
  text "GND" at 935.62,219.23 h30.6 r270
  text "RST" at 835.26,214.23 h30.6 r270
  text "23" at 30.96,137.15 h30.6
  text "19" at 133.51,137.15 h30.6
  text "18" at 233.51,137.15 h30.6
  text "5" at 346.25,137.15 h30.6
  text "22" at 430.96,137.15 h30.6
  text "21" at 536.05,137.15 h30.6
  text "32" at 630.96,137.15 h30.6
  text "33" at 730.96,137.15 h30.6
Bottom Overlay:
  drawing of 3286 lines, arcs and shapes, not listed
  text "4" at 467.35,607.54 h32.3
  text "14" at 580.8,607.54 h32.3
  text "15" at 680.8,607.54 h32.3
  text "27" at 783.49,607.54 h32.3
  text "26" at 883.49,607.54 h32.3
  text "25" at 983.49,607.54 h32.3
  text "5V" at 236.26,589.12 h30.6 r270
  text "BAT" at 36.26,558.53 h30.6 r270
  text "GND" at 136.26,558.53 h30.6 r270
  text "3V3" at 336.26,558.53 h30.6 r270
  text "23" at 24.51,167.46 h32.3 r180
  text "19" at 127.2,167.46 h32.3 r180
  text "18" at 227.2,167.46 h32.3 r180
  text "5" at 340.65,167.46 h32.3 r180
  text "22" at 424.51,167.46 h32.3 r180
  text "21" at 529.89,167.46 h32.3 r180
  text "32" at 624.51,167.46 h32.3 r180
  text "33" at 724.51,167.46 h32.3 r180
  text "RST" at 841.15,134.9 h30.6 r270
  text "GND" at 936.26,130 h30.6 r270
Dimension:
  the board outline again, w0
bPlace:
  text "-" at 330.75,472.95 h61.2 r270
  text "P3" at 71.31,362.04 h35.7 r270
  text "PSRAM" at 664.24,329.81 h35.7
  text "+" at 330.75,276.95 h61.2 r270
  text "tinypico.com" at 1201.14,122.35 h49.3 r270

## Dimensions
1289,39 to 1291,738 on tFinish
4,12.5 to 1254,12.5 on tFinish

## Text inside footprints (layer, text, board x,y; h text height)
PDTA143TMB,315: tDocu "SOT883(B)" at 941.97,454.47 h6.69
T2: tDocu "SOT883(B)" at 320.47,325.53 h6.69 r270
USB: tDocu "PCB Front" at -108.46,622.15 h10.2